# EAGLE board OwlPedal (EAGLE 9.6.2)
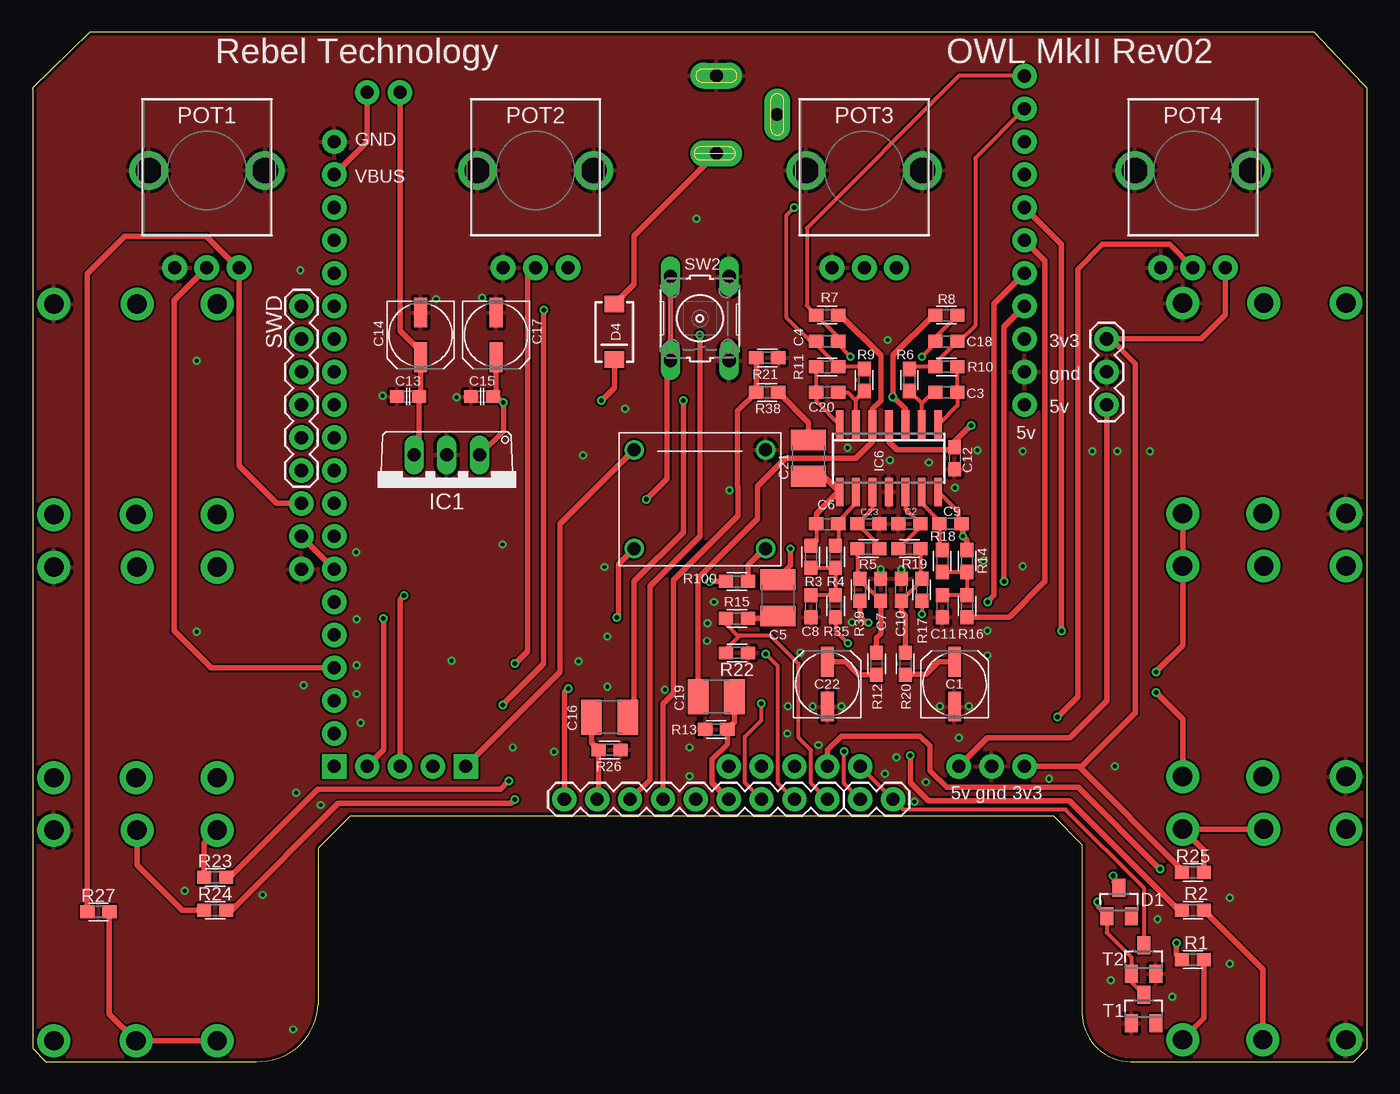
[diagram p0: board, top side]
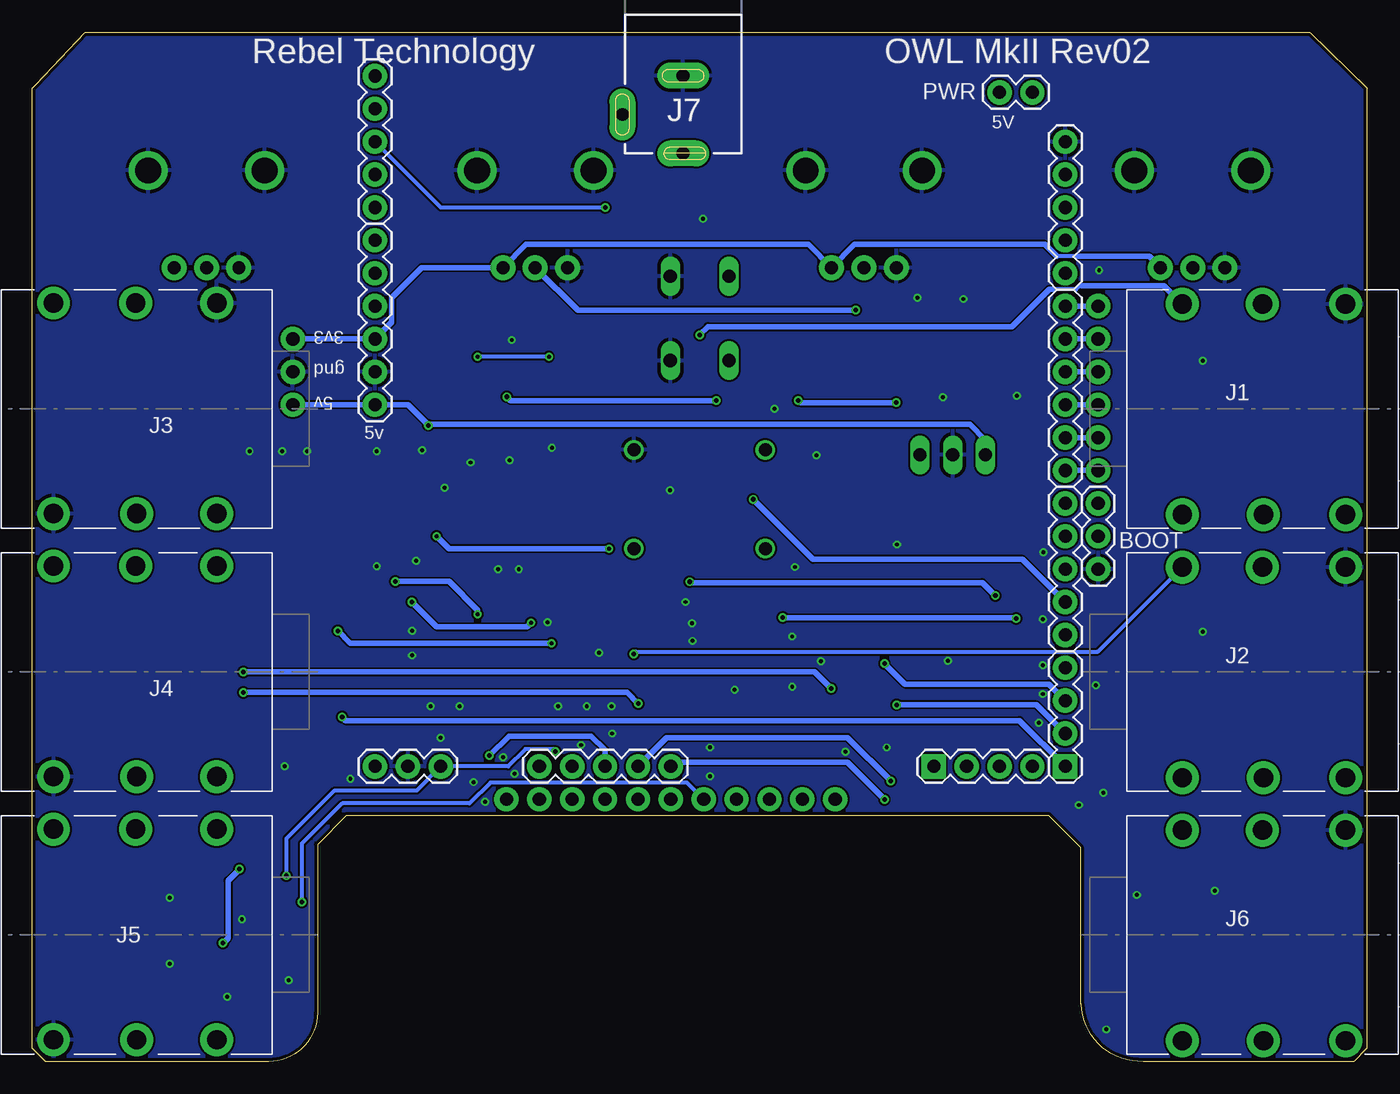
[diagram p1: board, bottom side, seen from below]

Size 103.15 x 79.5 mm. Coordinates in mm from the lower left corner, seen from the top.
Outline: 0.03,75.18 0.03,1.02 1.04,0 17.3,0 arc90 22.09,4.41 22.12,4.41 22.12,16.51 24.6,18.99 78.89,18.99 81.12,16.76 81.12,3.78 arc90 84.89,0 102.13,0 103.15,1.02 103.15,75.18 102.86,75.5 99.05,79.5 4.45,79.5 0,75.18 0.03,75.18
Copper layers (1*16): Top 0.035mm / dielectric 1.5mm / Bottom 0.035mm
Design rules "SeeedStudio_2layer_DRU_no_angle_20140221": minimum track width 6mil, minimum drill 12mil, track to track 6mil, track to pad 6mil, pad to pad 6mil, via to via 6mil, smd to smd 0mil, copper to edge 10mil, drill to drill 10mil, minimum pad ring 10mil, minimum via ring 6mil, stop-mask expansion 2mil, vias tented up to drill 100mil, thermal gap 10mil

## Footprints (pad centres in the part's own frame; a part is rotated, then mirrored left to right if it is on the bottom)
1X04 = drill 1.016 pad 1.88 square: 1 0,0 | drill 1.016 pad 1.88: 2 2.54,0; 3 5.08,0; 4 7.62,0
1X06 = drill 1.016 pad 1.88: 1 0,0; 2 2.54,0; 3 5.08,0; 4 7.62,0; 5 10.16,0; 6 12.7,0
1X05 = drill 1.016 pad 1.88: 1 0,0; 2 2.54,0; 3 5.08,0; 4 7.62,0; 5 10.16,0
1X03 = drill 1.016 pad 1.88: 1 0,0; 2 2.54,0; 3 5.08,0
CPOL-5 = smd 2.3 x 1: + 1.725,0; - -1.725,0
C0603 = smd 1.1 x 1: 1 -0.85,0; 2 0.85,0
C1210 = smd 1.6 x 2.7: 1 -1.4,0; 2 1.4,0
SOT23 = smd 1 x 1.4: 1 -0.95,-1.1; 2 0.95,-1.1; 3 0,1.1
SMA-DIODE = smd 1.27 x 1.47: A -2.15,0; C 2.15,0
TO220V = drill 1.016 long: 1 -2.54,-2.54; 2 0,-2.54; 3 2.54,-2.54
SO14 = smd 0.6 x 2.2: 1 -3.81,-2.6; 2 -2.54,-2.6; 3 -1.27,-2.6; 4 0,-2.6; 5 1.27,-2.6; 6 2.54,-2.6; 7 3.81,-2.6; 8 3.81,2.6; 9 2.54,2.6; 10 1.27,2.6; 11 0,2.6; 12 -1.27,2.6; 13 -2.54,2.6; 14 -3.81,2.6
NMJ6HCD2 = drill 1.5 pad 2.54: R -0.318,8.096; RN -0.238,-8.176; S 6.112,8.096; SN 6.112,-8.176; T -6.509,8.096; TN -6.509,-8.176
DC_JACK_SLOT = drill 1 pad 2 long: GND 0,4.743; GNDBREAK 4.697,7.742; PWR 0,10.749
1X09 = drill 1.016 pad 1.88: 1 0,0; 2 2.54,0; 3 5.08,0; 4 7.62,0; 5 10.16,0; 6 12.7,0; 7 15.24,0; 8 17.78,0; 9 20.32,0
1X02 = drill 1.016 pad 1.88: 1 0,0; 2 2.54,0
POT-ALPS-RK09L1140 = drill 1 pad 1.93: 1 -2.5,-7.5; 2 0,-7.5; 3 2.5,-7.5 | drill 2: P$5 -4.5,0; P$6 4.5,0
0603 = smd 1.1 x 1: 1 -0.85,0; 2 0.85,0
B3F-10XX = drill 1.016 long: 1 -3.251,2.261; 2 3.251,2.261; 3 -3.251,-2.261; 4 3.251,-2.261
5GTH9 = drill 1: 1 5.08,3.81; 4 -5.08,-3.81; +3 5.08,-3.81; -2 -5.08,3.81

## Placement (x,y rotation side)
ADC1  [1X04]  23.33,22.8 90 bottom
ANG1  [1X06]  76.67,50.74 90 bottom
ANG3  [1X05]  76.67,65.98 90 bottom
BOOT  [1X03]  20.79,38.04 90 bottom
C1  22u  [CPOL-5]  71.27,29.15 90 top
C2  1n C0G  [C0603]  67.78,41.53 0 top
C3  220p C0G  [C0603]  70.64,51.69 0 top
C4  2n2 C0G  [C0603]  61.43,55.63 0 top
C5  1u Film  [C1210]  57.62,35.81 270 top
C6  220p C0G  [C0603]  61.43,41.53 180 top
C7  4n7 C0G  [C0603]  65.56,36.45 90 top
C8  2n2 C0G  [C0603]  60.16,35.18 270 top
C9  220p C0G  [C0603]  70.95,41.53 0 top
C10  4n7 C0G  [C0603]  67.14,36.45 90 top
C11  2n2 C0G  [C0603]  70.32,35.18 270 top
C12  100n  [C0603]  71.27,46.61 270 top
C13  100n  [C0603]  29.05,51.37 180 top
C14  22u  [CPOL-5]  30,56.13 270 top
C15  100n 16v  [C0603]  34.76,51.37 180 top
C16  1u Film  [C1210]  44.6,26.61 180 top
C17  10u  [CPOL-5]  35.84,56.13 270 top
C18  2n2 C0G  [C0603]  70.64,55.63 180 top
C19  1u Film  [C1210]  52.86,28.19 0 top
C20  220p C0G  [C0603]  61.43,51.69 180 top
C21  1u Film  [C1210]  59.97,46.61 90 top
C22  22u  [CPOL-5]  61.43,29.15 90 top
C23  1n C0G  [C0603]  64.61,41.53 180 top
D1  BAS16  [SOT23]  83.97,12.32 0 top
D4  S1J  [SMA-DIODE]  44.97,56.37 270 top
EXTSPI  [1X04]  33.49,22.8 0 bottom
IC1  7805TV  [TO220V]  32.03,44.32 180 top
IC6  TS924  [SO14]  66.19,46.61 180 top
J1  NEUTRIK_NMJ6HCD2  [NMJ6HCD2]  7.77,50.42 0 bottom
J2  NEUTRIK_NMJ6HCD2  [NMJ6HCD2]  7.77,30.1 0 bottom
J3  NEUTRIK_NMJ6HCD2  [NMJ6HCD2]  95.4,50.42 180 bottom
J4  NEUTRIK_NMJ6HCD2  [NMJ6HCD2]  95.4,30.1 180 bottom
J5  NEUTRIK_NMJ6HCD2  [NMJ6HCD2]  95.4,9.78 180 bottom
J6  NEUTRIK_NMJ6HCD2  [NMJ6HCD2]  7.77,9.78 0 bottom
J7  POWER_JACK  [DC_JACK_SLOT]  52.86,80.9 180 bottom
JP3  M09  [1X09]  41.11,20.26 0 top
JP4  [1X03]  83.02,50.74 90 top
JP5  [1X03]  71.59,22.8 180 bottom
JP6  [1X02]  63.97,20.26 0 top
LGP1-5  [1X05]  53.81,22.8 180 bottom
POT1  POT-ALPS-RK09L1140  [POT-ALPS-RK09L1140]  13.49,68.83 0 top
POT2  POT-ALPS-RK09L1140  [POT-ALPS-RK09L1140]  38.89,68.83 0 top
POT3  POT-ALPS-RK09L1140  [POT-ALPS-RK09L1140]  64.29,68.83 0 top
POT4  POT-ALPS-RK09L1140  [POT-ALPS-RK09L1140]  89.69,68.83 0 top
PWR  [1X02]  28.41,74.87 0 bottom
R1  150R  [0603]  89.69,7.87 180 top
R2  150R  [0603]  89.69,11.68 180 top
R3  5k1  [0603]  60.16,38.99 90 top
R4  2k  [0603]  62.07,38.99 90 top
R5  1k  [0603]  64.61,39.62 0 top
R6  560R  [0603]  67.78,52.64 270 top
R7  10k  [0603]  61.43,57.66 180 top
R8  10k  [0603]  70.64,57.66 0 top
R9  560R  [0603]  64.29,52.64 270 top
R10  100R  [0603]  70.64,53.66 0 top
R11  100R  [0603]  61.43,53.66 180 top
R12  1k  [0603]  65.24,30.73 90 top
R13  1M  [0603]  52.86,25.65 180 top
R14  5k1  [0603]  72.22,38.67 90 top
R15  22R  [0603]  54.45,34.23 180 top
R16  5k1  [0603]  72.22,35.18 90 top
R17  1k  [0603]  68.73,36.45 90 top
R18  2k  [0603]  70.32,38.67 90 top
R19  1k  [0603]  67.78,39.62 180 top
R20  1k  [0603]  67.46,30.73 90 top
R21  100k  [0603]  56.79,54.36 0 top
R22  100k  [0603]  54.45,31.56 0 top
R23  150R  [0603]  14.12,14.22 0 top
R24  150R  [0603]  14.12,11.68 0 top
R25  150R  [0603]  89.69,14.61 0 top
R26  1M  [0603]  44.6,24.07 0 top
R27  150R  [0603]  5.11,11.56 0 top
R35  5k1  [0603]  62.07,35.18 90 top
R38  22R  [0603]  56.79,51.69 180 top
R39  1k  [0603]  63.97,36.45 90 top
R100  150R  [0603]  54.45,37.08 180 top
SW2  [B3F-10XX]  51.59,57.4 90 top
SWD  [1X06]  20.79,58.36 270 top
SWD2  [1X06]  23.33,58.36 270 bottom
T1  BC846  [SOT23]  85.88,4.06 0 top
T2  2N7002P  [SOT23]  85.88,7.87 0 top
TGP1-4  [1X05]  23.33,43.12 270 bottom
U$1  5GTH9  [5GTH9]  51.59,43.43 0 top
USB1  [1X05]  23.33,60.9 90 bottom

## Library data of the parts
ADC1 ANG1 ANG3 BOOT D4 EXTSPI JP3-JP6 LGP1-5 PWR SWD SWD2 TGP1-4 USB1 = SparkFun
C1 C5 C13-C17 C19 C21 C22 J7 POT1-POT4 R1-R27 R35 R38 R39 R100 = Rebel
C2-C4 C6-C12 C18 C20 C23 = resistor
D1 T1 T2 = NXP_60_26022015
IC1 IC6 = linear
J1-J6 = neutrik_jacks
SW2 = switch-omron; MPN: B3F-1000; OC_FARNELL: 176432; OC_NEWARK: 36M3542
U$1 = SWITCH-5GTH9

## Nets
+3V3: ANG1.3 BOOT.3 JP4.3 JP5.3 POT1.3 POT2.3 POT3.3 POT4.3 R25.1 R27.1
+5V: ANG1.1 C12.1 C13.1 C14.+ D1.3 IC1.3 IC6.4 JP4.1 JP5.1 JP6.1 PWR.1
+9V: D4.A J7.PWR
A1: LGP1-5.1 R24.2
A2: LGP1-5.2 R23.2
A3: LGP1-5.3 R2.2
A4: LGP1-5.4 R1.2
A5: JP6.2 LGP1-5.5 T2.3
A13: TGP1-4.1
A14: TGP1-4.2
A16_SW2: SW2.1 SW2.2 TGP1-4.4
A17: TGP1-4.5
A18_ADC1: ADC1.4 POT1.2
A19_ADC2: ADC1.3 POT2.2
A20_ADC3: ADC1.2 POT3.2
A21_ADC4: ADC1.1 POT4.2
A22: EXTSPI.4 U$1.4
A23: EXTSPI.3 R100.2
A24: EXTSPI.2
A25: EXTSPI.1 U$1.-2
AIN_A: ANG3.4 C18.1 R6.1 R10.1
AIN_B: ANG3.3 C4.1 R9.1 R11.1
AOUT_A+: ANG1.5 R39.1
AOUT_A-: ANG3.1 R35.1
AOUT_B+: ANG1.4 R17.1
AOUT_B-: ANG1.6 R16.1
BOOT0: BOOT.2 TGP1-4.3
BYPASS: D1.1 JP3.5 T1.3 T2.1
CS_VQ1: ANG3.2
CS_VREF: ANG3.5 C4.2 C18.2 R7.2 R8.2
DC_IN_L: C16.1 IC6.3 R8.1
DC_IN_R: C19.1 IC6.5 R7.1
FX_IN_L: C16.2 JP3.2 R26.1
FX_IN_R: C19.2 JP3.6 R13.1
FX_OUT_L: JP3.4 R21.1 R38.2
FX_OUT_R: JP3.9 R15.2 R22.1
GND: ANG1.2 BOOT.1 C1.- C2.1 C7.2 C8.2 C10.2 C11.2 C12.2 C13.2 C14.- C15.2 C17.- C22.- C23.1 IC1.2 IC6.11 J1.S J2.S J3.S J3.TN J4.S J5.S J6.S J7.GND JP4.2 JP5.2 POT1.1 POT1.P$5 POT1.P$6 POT2.1 POT2.P$5 POT2.P$6 POT3.1 POT3.P$5 POT3.P$6 POT4.1 POT4.P$5 POT4.P$6 R13.2 R21.2 R22.2 R26.2 SW2.3 SW2.4 T1.1 T2.2 U$1.1 USB1.5
IN_L: J3.T J4.TN JP3.1
IN_R: J4.T JP3.7
N$1: J5.RN J5.TN R25.2
N$2: J6.R R24.1
N$3: SWD2.1 SWD.1
N$4: J6.RN J6.TN R27.2
N$5: SWD2.2 SWD.2
N$6: SWD2.3 SWD.3
N$7: SWD2.4 SWD.4
N$8: SWD2.5 SWD.5
N$9: SWD2.6 SWD.6
N$10: R100.1 U$1.+3
N$11: C6.2 C21.1 IC6.8 R3.2
N$12: J5.R R2.1
N$13: C8.1 R3.1 R4.1 R35.2
N$14: C20.1 IC6.6 R9.2
N$15: J5.T R1.1
N$16: C6.1 IC6.9 R4.2
N$17: C23.2 IC6.10 R5.2
N$18: C7.1 R5.1 R12.2 R39.2
N$19: C9.1 IC6.13 R18.2
N$20: C2.2 IC6.12 R19.2
N$21: C10.1 R17.2 R19.1 R20.2
N$22: C3.1 IC6.2 R6.2
N$23: C3.2 IC6.1 R10.2
N$24: C11.1 R14.1 R16.2 R18.1
N$25: C20.2 IC6.7 R11.2
N$26: J6.T R23.1
N$27: C21.2 R38.1
N$29: C22.+ R12.1
N$31: C1.+ R20.1
N$37: C5.1 C9.2 IC6.14 R14.2
N$38: C5.2 R15.1
N$51: C15.1 C17.+ D4.C IC1.1
OUT_L: J1.T JP3.3
OUT_R: J2.T JP3.8
USB_DM: USB1.3
USB_DP: USB1.2
USB_ID: USB1.1
USB_VBUS: PWR.2 USB1.4

## Tracks (layer width: path | path; a pad name or v marks a point on that pad's centre or on a via)
+3V3
  Top 0.406: POT4.3 92.19,57.68 90.32,55.82 83.34,55.82 | 83.34,55.82 JP4.3 | JP5.3 80.86,22.8 | 80.86,22.8 81.12,22.8 85.24,26.92 85.24,53.91 83.34,55.82 | BOOT.3 18.89,43.12 15.99,46.01 15.99,61.21 | 15.99,61.21 POT1.3 | R25.1 88.84,14.82 80.86,22.8 | R27.1 4.26,60.87 7.14,63.75 13.45,63.75 15.99,61.21
  Bottom 0.305: 22.38,62.19 23.99,62.19
  Bottom 0.406: JP4.3 ANG1.3 75.37,57.11 75.37,59.02 73.06,61.33 POT3.3 65,63.12 43.17,63.12 POT2.3 39.6,63.12 24.92,63.12 23.99,62.19 | POT1.3 15.99,61.35 16.83,62.19 22.38,62.19
+5V  (via drill 0.35)
  Top 0.305: v62.73,23.97 62.73,21.5 JP6.1 | v83.53,14.35 83.53,13.86 D1.3
  Top 0.406: IC6.4 66.19,47.88 66.83,47.24 71.06,47.24 C12.1 71.27,47.88 v72.54,49.15 | PWR.1 28.41,56.45 30,54.86 C14.+ 30,51.47 C13.1 29.9,47.27 IC1.3 | JP5.1 73.81,25.02 80.18,25.02 81.48,26.32 81.48,26.34 83.02,27.88 JP4.1
  Bottom 0.305: v62.73,23.97 62.89,24.13 65.05,24.13 66.38,22.8 JP5.1 73.43,20.95 79.78,20.95 83.53,17.21 v83.53,14.35
  Bottom 0.406: JP4.1 ANG1.1 74.13,50.74 v72.54,49.15 72.47,49.22 30.7,49.22 29.49,48.01 IC1.3
+9V
  Top 0.406: J7.PWR 46.51,63.8 46.51,60.06 D4.A
A1  (via drill 0.35)
  Top 0.406: v37.3,20.26 36.98,19.94 23.65,19.94 15.39,11.68 R24.2
  Bottom 0.406: v37.3,20.26 40.16,23.11 53.49,23.11 LGP1-5.1
A2  (via drill 0.35)
  Top 0.406: R23.2 15.24,14.22 22.06,21.04 36.18,21.04 v36.82,21.68
  Bottom 0.406: v36.82,21.68 40.16,25.02 54.13,25.02 LGP1-5.2
A3  (via drill 0.35)
  Top 0.406: R2.2 88.58,11.68 80.14,20.13 69.24,20.13 67.84,21.53 v67.84,23.62
  Bottom 0.406: LGP1-5.3 58.89,24.07 59.97,25.15 66.32,25.15 v67.84,23.62
A4  (via drill 0.35)
  Top 0.406: v87.15,14.86 80.82,21.18 70.66,21.18 69.37,22.48 69.37,24.38 68.61,25.15 62.51,25.15 61.43,24.07 LGP1-5.4 | R1.2 88.42,8.29 v88.42,9.14
  Bottom 0.406: v87.15,14.86 88.04,13.97 88.04,9.53 v88.42,9.14
A5
  Top 0.305: LGP1-5.5 JP6.2 67.31,19.46 79.85,19.46 85.88,13.42 T2.3
A16_SW2  (via drill 0.35)
  Top 0.406: v47.46,43.43 49.05,45.02 49.05,53.87 SW2.1 SW2.2
  Bottom 0.406: TGP1-4.4 26.63,38.8 42.82,38.8 v47.46,43.43
A18_ADC1
  Top 0.406: POT1.2 10.95,58.79 10.95,33.27 13.81,30.42 ADC1.4
A19_ADC2  (via drill 0.35)
  Top 0.406: POT2.2 38.25,60.7 38.25,31.69 v37.3,30.73
  Bottom 0.406: ADC1.3 24.6,29.15 35.71,29.15 v37.3,30.73
A20_ADC3  (via drill 0.35)
  Top 0.406: v36.35,27.56 39.52,30.73 v39.52,58.04
  Bottom 0.406: ADC1.2 25.55,27.56 v36.35,27.56 | v39.52,58.04 60.99,58.04 POT3.2
A21_ADC4  (via drill 0.35)
  Top 0.406: POT4.2 87.9,63.12 82.7,63.12 80.8,61.21 80.8,28.19 v79.21,26.61
  Bottom 0.406: v79.21,26.61 78.94,26.34 26.87,26.34 ADC1.1
A22  (via drill 0.35)
  Top 0.406: EXTSPI.4 27.14,24.07 v27.14,34.23 | U$1.4 45.3,38.42 45.3,34.42 v45.17,34.29
  Bottom 0.406: v45.17,34.29 27.2,34.29 v27.14,34.23
A23  (via drill 0.35)
  Top 0.406: EXTSPI.3 28.41,35.66 v28.73,35.98 | v52.35,37.06 52.37,37.08 R100.2
  Bottom 0.406: v28.73,35.98 29.74,37 52.29,37 v52.35,37.06
A25
  Top 0.406: EXTSPI.1 40.79,30.1 40.79,41.53 U$1.-2
AIN_A
  Top 0.305: R6.1 67.95,53.66 R10.1 69.79,53.93 C18.1 71.65,55.63 72.86,56.83 72.86,69.79 ANG3.4
AIN_B  (via drill 0.35)
  Top 0.305: R9.1 64.12,53.66 R11.1 60.58,55.36 C4.1 60.14,55.63 58.26,57.51 58.26,65.34 v58.89,65.98
  Bottom 0.305: ANG3.3 71.59,65.98 v58.89,65.98
AOUT_A+  (via drill 0.3, 0.35)
  Top 0.406: v64.61,33.91 64.39,33.91 63.97,34.33 R39.1 | ANG1.5 74.32,58.55 74.32,36 v73.81,35.5
  Bottom 0.406: v73.81,35.5 71.91,33.59 64.92,33.59 v64.61,33.91
AOUT_A-  (via drill 0.3, 0.35)
  Top 0.305: R35.1 62.07,33.27 v63.02,32.32
  Top 0.406: ANG3.1 79.53,63.12 v79.53,33.27
  Bottom 0.406: v63.02,32.32 78.57,32.32 v79.53,33.27
AOUT_B+  (via drill 0.3, 0.35)
  Top 0.305: R17.1 v68.73,34.54
  Top 0.406: ANG1.4 75.08,56.77 v75.08,37.08
  Bottom 0.406: v75.08,37.08 70.96,37.08 68.73,34.86 v68.73,34.54
AOUT_B-
  Top 0.406: ANG1.6 78.26,61.85 78.26,37.08 75.5,34.33 R16.1
BOOT0
  Top 0.406: TGP1-4.3 BOOT.2
BYPASS  (via drill 0.35)
  Top 0.305: v82.32,12.32 82.32,11.92 D1.1 83.02,9.95 84.93,8.04 T2.1 84.93,6.11 T1.3
  Bottom 0.305: JP3.5 52.57,21.55 67.75,21.55 69.37,19.94 79.21,19.94 82.32,16.83 v82.32,12.32
CS_VREF  (via drill 0.3)
  Top 0.305: R8.2 69.79,55.96 C18.2 69.79,55.5 v68.73,54.45 | v63.23,54.45 62.21,55.47 C4.2 62.28,55.96 R7.2 59.84,58.4 59.84,64.39 71.59,76.14 ANG3.5
  Bottom 0.305: v63.23,54.45 v68.73,54.45
DC_IN_L  (via drill 0.35)
  Top 0.406: IC6.3 67.46,50.42 66.51,51.37 | 66.51,51.37 66.51,54.55 69.62,57.66 R8.1 | C16.1 46.51,27.11 46.51,37.08 50.32,40.89 v50.32,51.05 | v66.49,51.35 66.51,51.37
  Bottom 0.406: v50.32,51.05 66.19,51.05 v66.49,51.35
DC_IN_R
  Top 0.406: R7.1 62.45,57.66 65.56,54.55 65.56,51.05 64.92,50.42 IC6.5 64.92,47.88 63.65,46.61 58.19,46.61 56.03,44.45 56.03,41.91 51.46,37.34 C19.1
FX_IN_L
  Top 0.406: C16.2 43.2,24.62 R26.1 43.75,20.36 JP3.2
FX_IN_R
  Top 0.406: JP3.6 52.51,21.55 52.51,23.33 53.71,24.53 R13.1 54.26,26.2 C19.2
FX_OUT_L
  Top 0.406: JP3.4 48.73,27.63 49.54,28.43 49.54,37.19 54.52,42.18 54.52,44.41 54.51,44.42 54.51,50.25 R38.2 R21.1
FX_OUT_R
  Top 0.305: JP3.9 60.19,21.5 60.19,24.04 59.21,25.02 59.21,30.73 57.05,32.89 54.64,32.89 54.57,32.83 | 54.57,32.83 53.59,31.85 R22.1 | 54.57,32.83 53.59,33.81 R15.2
GND  (via drill 0.3)
  Top 0.305: C10.2 v67.15,38.04 | C7.2 v65.56,38.04
  other vias: 20.16,2.48 32.79,51.31 27.08,51.44 36.35,39.94 34.76,58.99 73.02,47.22 71.3,44.31 66.1,55.74 63.01,47.42 66.27,46.44 69.27,46.27 63.35,33.94 45.8,50.44 53.86,44.14 59.35,31.56 20.38,20.77 76.53,38.25 25.03,39.35 31.19,58.9 52.18,33.85 58.4,27.44 48.88,28.71 44.43,28.96 42.21,30.93 25.06,28.39 25.38,26.17 25.06,30.61 25.06,34.17 20.71,61.13 76.53,47.14 81.93,47.14 83.83,47.14 86.37,47.14 50.78,24.26 50.78,22.04 37.13,24.26 58.34,25.34 60.3,27.44 62.53,27.44 70.15,27.44 72.37,27.44 32.4,30.96 42.56,46.84 44.21,38.2 52.15,32.49 51.32,65.09 20.97,29.06 12.71,33.19 12.71,54.14 17.79,12.87 83.34,6.29 88.1,5.02 92.54,7.56 92.54,12.64 83.66,22.8 78.57,21.84 71.59,25.02 73.81,31.37 73.81,33.27 73.49,38.67 52.67,35.5 40.3,23.94 44.43,32.83 11.76,13.18 22.28,19.82 66.76,23.49 65.88,22.23 60.75,24.45 86.96,10.99 69.05,21.59 68.16,20.07
  pour Bottom: -5.56,-1.02 -5.56,82.17 109.69,82.17 109.69,-1.02 66.83,-1.02
  pour Top: -6.83,-2.29 -6.83,80.9 108.42,80.9 108.42,-2.29 65.56,-2.29
IN_L  (via drill 0.35)
  Top 0.406: JP3.1 41.11,23.11 41.11,23.33 41.11,28.51 v41.43,28.83 | J3.T J4.TN 88.89,32.16 v86.83,30.1
  Bottom 0.406: v41.43,28.83 42.7,30.1 v86.83,30.1
IN_R  (via drill 0.35)
  Top 0.305: JP3.7 55.05,21.55 55.05,25.1 56.33,26.37 v56.33,27.64
  Top 0.406: v86.83,28.51 | v86.83,28.51 88.89,26.45 J4.T
  Bottom 0.406: v56.33,27.64 57.2,28.51 v86.83,28.51
N$1
  Top 0.406: J5.RN J5.TN 90.54,16.31 R25.2
N$2
  Top 0.406: R24.1 11.58,11.68 8.09,15.18 J6.R
N$3
  Bottom 0.406: SWD2.1 SWD.1
N$4
  Top 0.406: J6.TN J6.RN 5.96,3.66 R27.2
N$5
  Bottom 0.406: SWD2.2 SWD.2
N$6
  Bottom 0.406: SWD2.3 SWD.3
N$7
  Bottom 0.406: SWD2.4 SWD.4
N$8
  Bottom 0.406: SWD2.5 SWD.5
N$9
  Bottom 0.406: SWD2.6 SWD.6
N$10
  Top 0.406: U$1.+3 56.57,39.62 55.3,38.35 R100.1
N$11
  Top 0.305: C6.2 60.58,40.26 | 62.32,44.07 IC6.8
  Top 0.406: 60.58,40.26 R3.2 | C6.2 60.58,42.33 62.32,44.07 61.18,45.21 C21.1
N$12
  Top 0.406: R2.1 95.08,7.14 J5.R
N$13
  Top 0.305: R3.1 R4.1 R35.2 C8.1
N$14
  Top 0.305: IC6.6 63.65,51.05 | 63.65,51.05 63.65,51.16 R9.2 | C20.1 63.02,51.69 63.65,51.05
N$15
  Top 0.406: J5.T 90.54,3.33 R1.1
N$16
  Top 0.305: R4.2 62.28,40.05 C6.1 62.07,41.74 62.28,41.74 63.65,43.12 IC6.9
N$17
  Top 0.305: R5.2 65.46,39.83 C23.2 64.92,42.7 IC6.10
N$18
  Top 0.305: R5.1 63.76,37.51 R39.2 63.97,37.19 C7.1
  Top 0.406: R12.2 65.24,32.74 65.56,33.06 C7.1
N$19
  Top 0.305: R18.2 70.1,39.74 C9.1 70.32,41.74 70.1,41.74 68.73,43.12 IC6.13
N$20
  Top 0.305: R19.2 68.63,41.32 C2.2 67.46,42.7 IC6.12
N$21
  Top 0.305: R19.1 68.63,37.4 R17.2 68.73,37.19 C10.1
  Top 0.406: C10.1 67.15,34.76 67.46,34.44 R20.2
N$22
  Top 0.305: IC6.2 68.73,50.84 | 68.73,50.84 R6.2 | C3.1 69.58,51.69 68.73,50.84
N$23
  Top 0.305: IC6.1 71.49,50.69 C3.2 R10.2
N$24
  Top 0.305: R18.1 R14.1 R16.2 C11.1
N$25
  Top 0.305: IC6.7 60.58,51.01 C20.2 R11.2
N$26
  Top 0.406: R23.1 13.27,16.87 J6.T
N$27
  Top 0.406: R38.1 59.97,49.36 C21.2
N$29
  Top 0.406: C22.+ 62.88,30.87 63.87,29.88 R12.1
N$31
  Top 0.406: C1.+ 70,30.87 69.05,29.92 67.46,29.92 R20.1
N$37  (via drill 0.3)
  Top 0.305: IC6.14 71.59,42.42 71.59,41.74 C9.2 71.91,41.43
  Top 0.406: v58.57,39.62 58.57,38.35 57.62,37.4 C5.1 | 71.91,41.43 v71.91,40.58 72.23,40.26 R14.2
  Bottom 0.406: v58.57,39.62 70.96,39.62 v71.91,40.58
N$38
  Top 0.406: C5.2 57.43,34.23 R15.1
N$51  (via drill 0.35)
  Top 0.406: C17.+ 35.84,51.6 C15.1 35.93,51.37 v36.4,50.89 36.4,48.7 IC1.1 | D4.C 44.97,52.06 v43.97,51.05
  Bottom 0.406: v43.97,51.05 43.81,50.89 v36.4,50.89
OUT_L  (via drill 0.35)
  Top 0.406: JP3.3 47.71,21.78 47.71,36.7 51.59,40.58 v51.59,56.13
  Bottom 0.305: 22.06,59.94 22.2,59.94 22.5,59.65 24.28,59.65
  Bottom 0.406: J1.T 15.71,59.94 22.06,59.94 | 24.28,59.65 24.57,59.65 27.46,56.77 50.95,56.77 v51.59,56.13
OUT_R  (via drill 0.35)
  Top 0.305: JP3.8 57.59,21.55 57.59,30.57 v56.67,31.5
  Bottom 0.305: J2.T 20.82,31.66 56.5,31.66 v56.67,31.5
USB_VBUS
  Top 0.406: USB1.4 25.87,71.06 PWR.2

## Text on the board
tPlace: Rebel Technology | OWL MkII Rev02 | GND | VBUS | 3v3 | gnd | 5v | 5v | 5v | gnd | 3v3
bPlace: OWL MkII Rev02 | Rebel Technology | 5V | 3v3 | gnd | 5v | 5v | BOOT